# Allegro board Power_Source_Board_20180717.brd
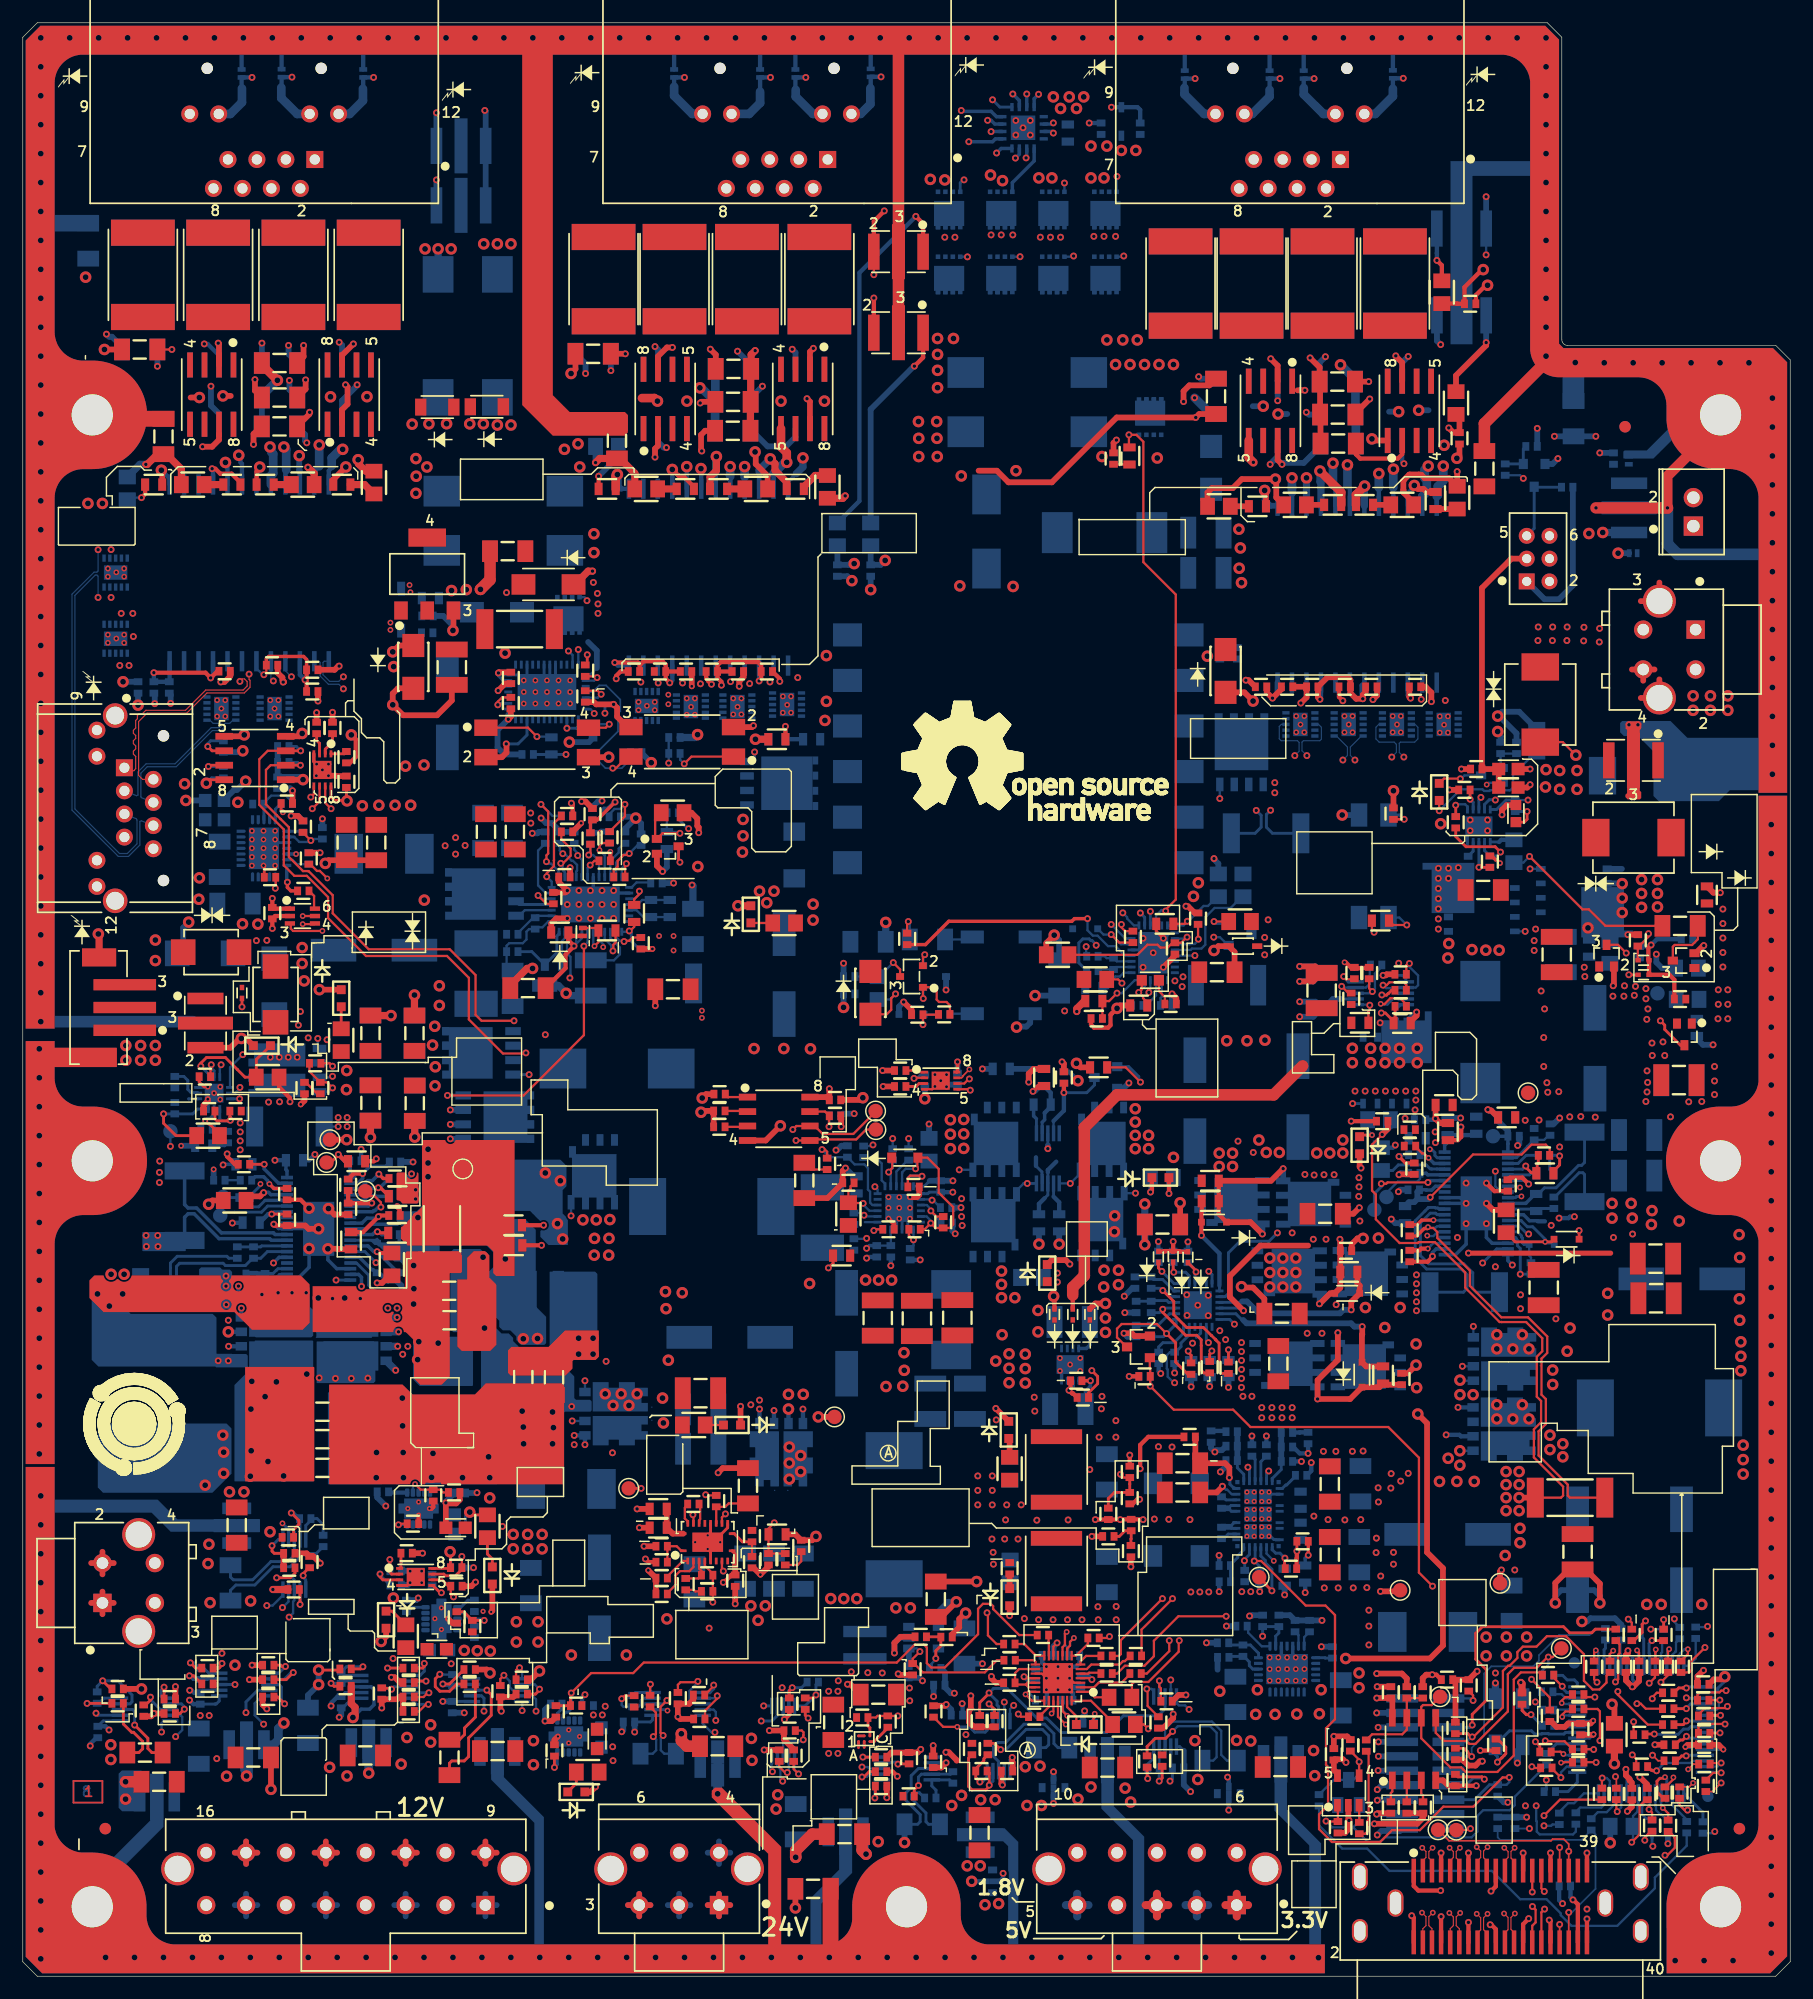
[diagram p0: board, top side]
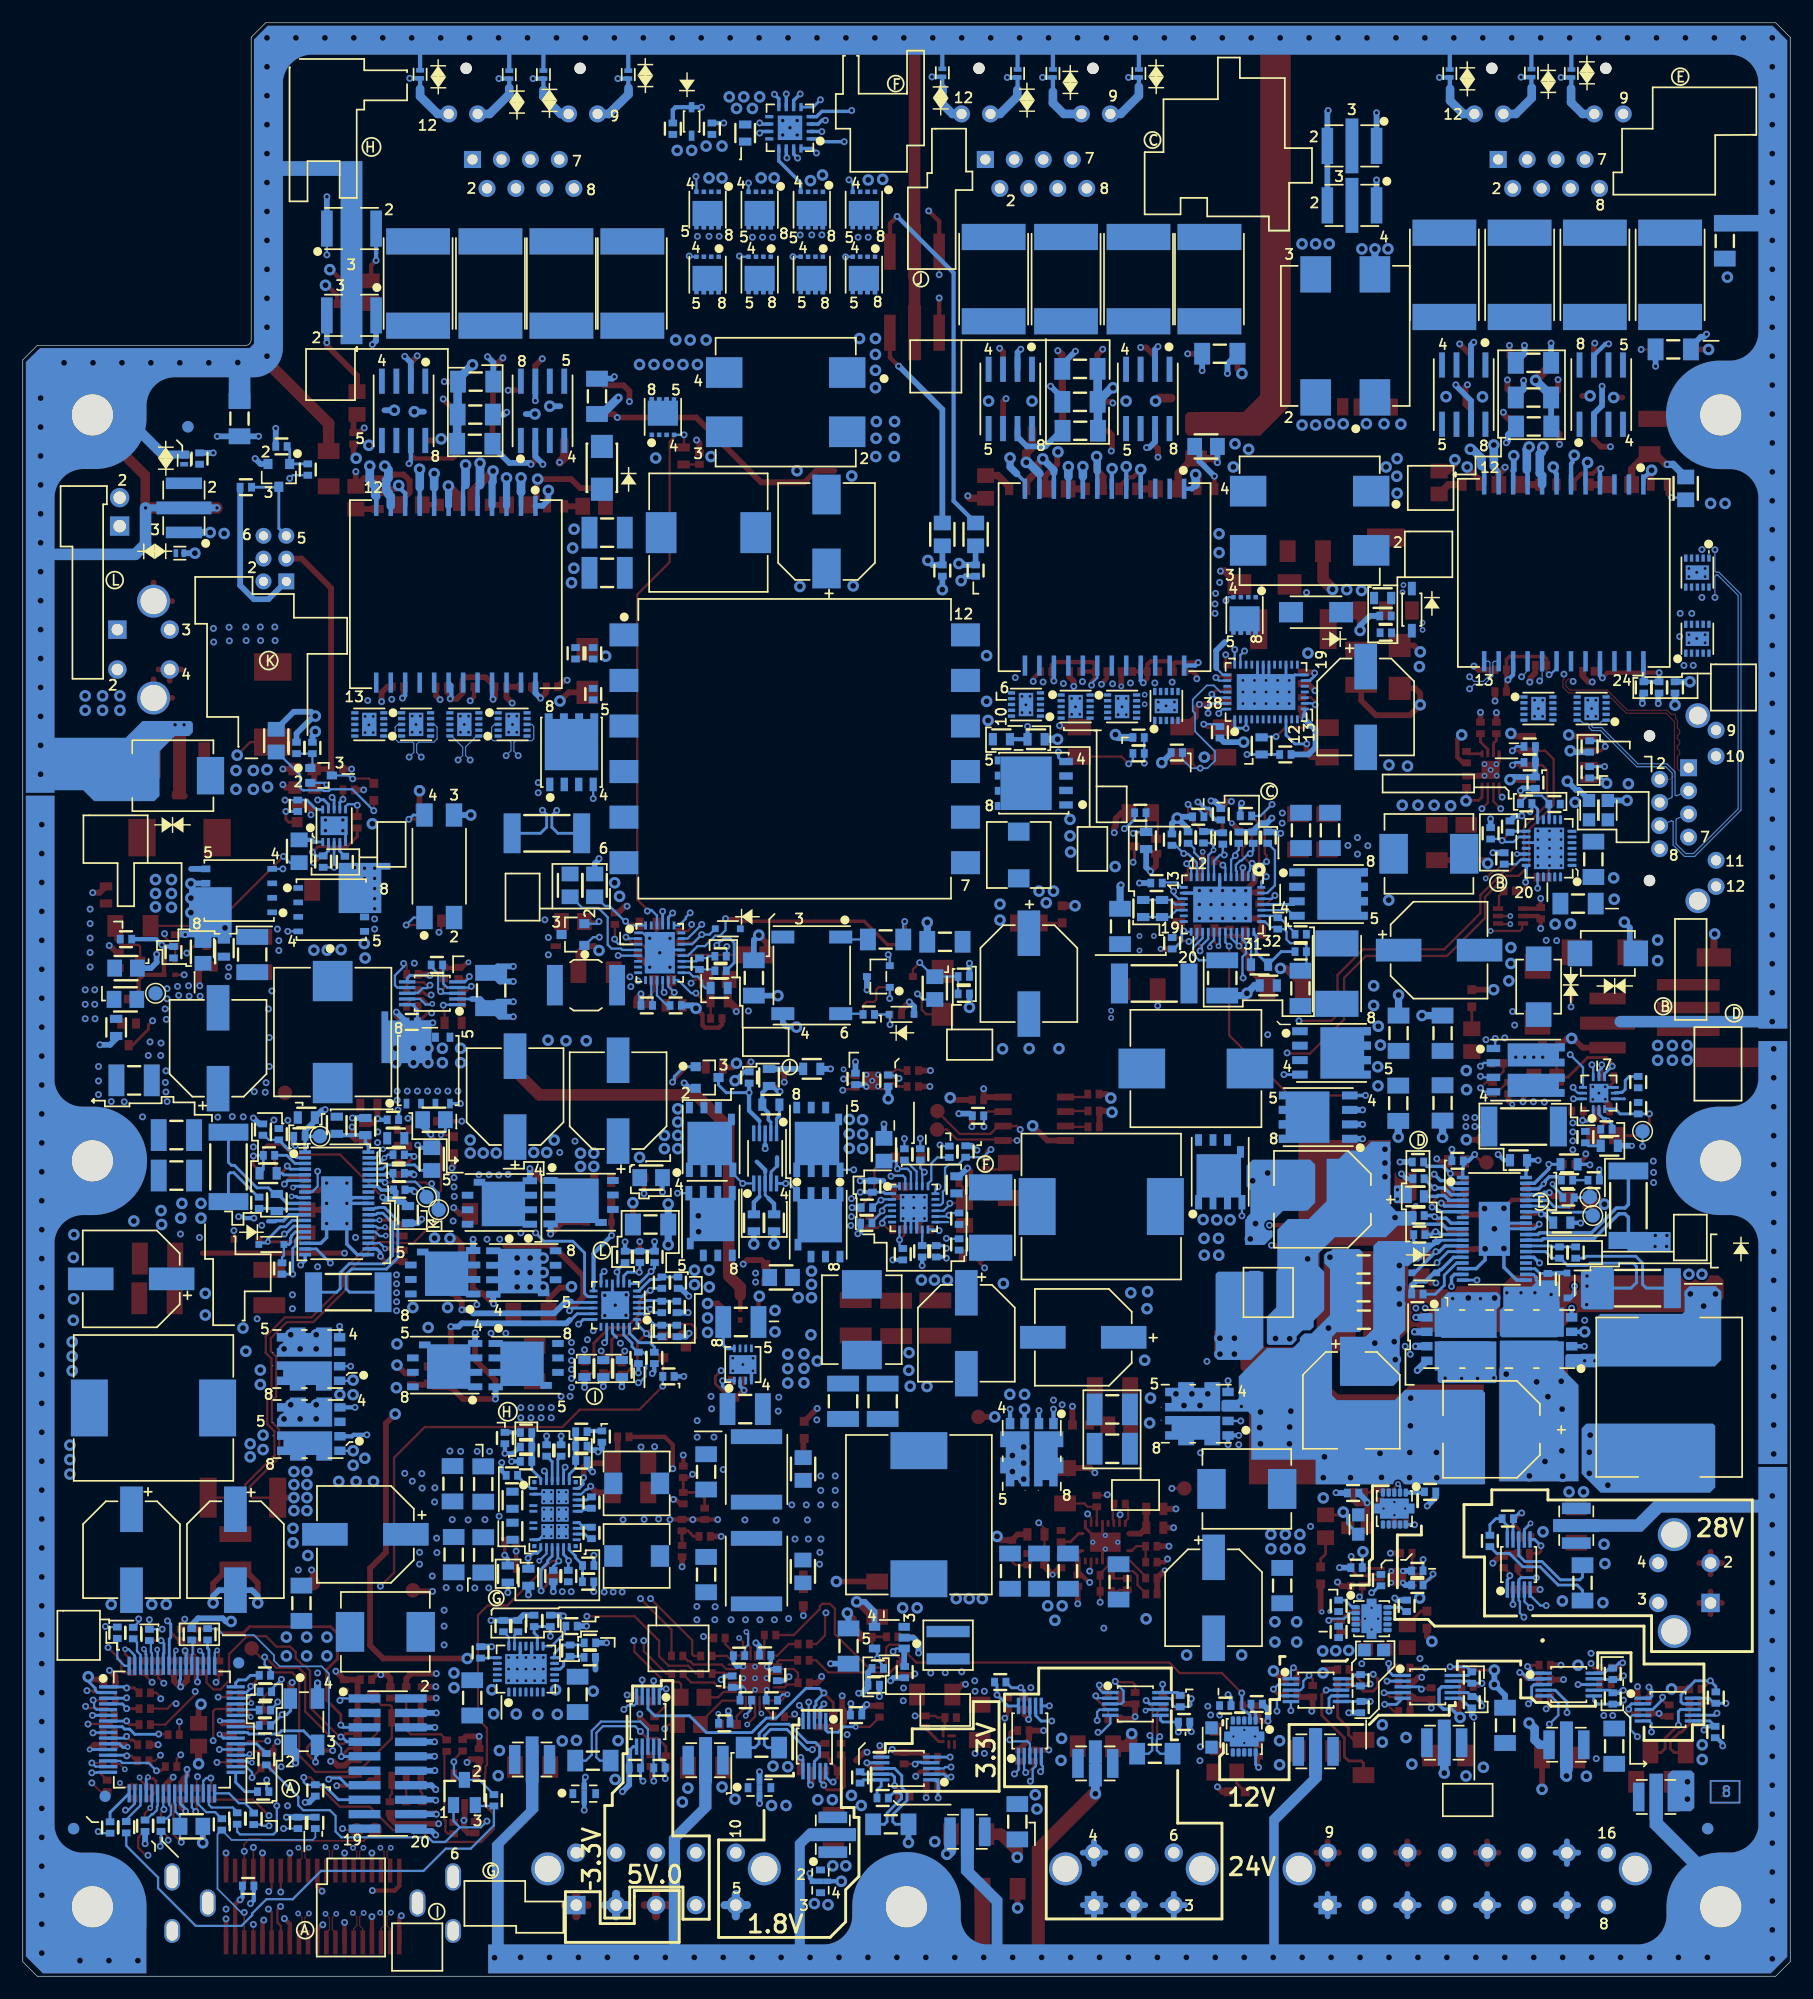
[diagram p1: board, bottom side, seen from below]

Outline 155.08 x 171.48 mm; copper layers: TOP, GND1, SIG1, GND2, PWR, SIG2, GND3, BOTTOM. Coordinates in mm from the lower left corner of the outline.
Outline path: 0,170.21 1.27,171.48 133.77,171.48 135.04,170.21 135.04,143.66 arc(135.19,143.31) 135.55,143.16 153.81,143.16 155.08,141.89 155.08,1.27 153.81,0 1.27,0 0,1.27 0,170.21

## Design rules (mm)
net group DIFFPAIR0: nets PC_ETH_D0N PC_ETH_D0P
net group DIFFPAIR9: nets PA_ETH_D2N PA_ETH_D2P
net group DIFFPAIR10: nets PA_ETH_D1N PA_ETH_D1P
net group DP1: nets CHASIS_GND N479533
net group N430544: nets N430544 N430548
net group N430972: nets N430972 N431358
net group PA_ETH_D3: nets PA_ETH_D3N PA_ETH_D3P
net group DIFFPAIR5: nets PB_ETH_D0N
net group N430248: nets N430628

## Placement (name value [footprint] x y rotation side)
C1  0.47UF  [EMIFIL_101X43W474MV4E]  76.83 151.38 180 top
C2  0.1uF  [CC0402]  127 146.81 0 top
C3  0.47UF  [EMIFIL_101X43W474MV4E]  76.83 144.27 180 top
C3L1  1uF  [CC1206]  18.77 39.6 90 top
C3L2  1uF  [CC1206]  60.97 20.19 0 top
C3L3  1uF  [CC1206]  41.66 19.76 0 top
C3L4  1uF  [CC1206]  30.06 19.38 0 top
C3L5  1uF  [CC1206]  20.23 19.2 0 top
C3L6  1uF  [CC1206]  110.35 18.36 0 top
C3L7  1uF  [CC1206]  95.17 18.31 0 top
C3L8  1uF  [CC1206]  11.96 17.07 180 top
C3L9  1uF  [CC1206]  83.95 12.6 90 top
C3L10  1uF  [CC1206]  72.09 12.47 0 top
C3M1  0.22uF  [CC0402]  51.49 99.97 90 top
C3M2  0.47uF  [CC0603]  51.26 91.8 0 top
C3M3  0.1uF  [CC0603]  47.12 91.62 180 top
C3M4  0.01uF  [CC0402]  51.49 99.97 90 bottom
C3M5  0.1uF  [CC0603]  56.77 93.73 90 bottom
C3M6  0.1uF  [CC0603]  45.8 86.97 0 bottom
C3M7  150uF  [CAPAE830X1050N]  26.21 48.01 270 bottom
C3M8  150uF  [CAPAE830X1050N]  136.42 37.44 180 bottom
C4  1000PF  [CC1206]  12.34 135.16 90 top
C5  0.1uF  [CC0402]  126.06 135 270 top
C6  1000PF  [CC1206]  52.13 134.78 90 top
C7  10nF  [CC0402]  95.71 133.22 90 top
C8  1000PF  [CC1206]  128.24 132.33 90 top
C9  0.01uF  [CC0805]  30.81 131.11 90 top
C10  0.01uF  [CC0805]  14.91 130.94 180 top
C11  0.01uF  [CC0805]  24.57 130.94 0 top
C12  0.01uF  [CC0805]  70.6 130.74 270 top
C13  0.01uF  [CC0805]  54.7 130.56 180 top
C14  0.01uF  [CC0805]  64.35 130.56 0 top
C15  0.01uF  [CC0805]  125.86 129.79 90 top
C16  0.01uF  [CC0805]  111.63 129.16 180 top
C17  0.01uF  [CC0805]  121.03 129.16 0 top
C18  0.01uF  [CC0805]  104.95 129.03 180 top
C19  0.22uF  [CC1206]  42.55 125.09 0 top
C20  10nF  [CC0402]  21.87 115.09 0 top
C21  1.0uF  [CC1210]  37.64 114.91 90 top
C22  1000PF  [CC0402]  25.4 114.68 0 top
C23  0.1uF  [CC0402]  17.71 114.55 0 top
C24  10nF  [CC0402]  53.63 114.53 180 top
C25  1000PF  [CC0402]  55.91 114.53 180 top
C26  0.1uF  [CC0402]  58.2 114.53 0 top
C27  1000PF  [CC0402]  60.46 114.53 180 top
C28  10nF  [CC0402]  62.74 114.53 0 top
C29  0.1uF  [CC0402]  65.28 114.53 0 top
C30  0.1uF  [CC0402]  42.82 113.97 270 top
C31  10nF  [CC0402]  108.65 113.19 180 top
C32  0.1uF  [CC0402]  110.93 113.19 0 top
C33  10nF  [CC0402]  113.14 113.19 180 top
C34  0.1uF  [CC0402]  115.99 113.19 180 top
C35  1000PF  [CC0402]  118.33 113.19 0 top
C36  1000PF  [CC0402]  122.16 113.19 0 top
C37  0.1uF  [CC0402]  25.4 112.78 0 top
C38  0.47UF  [EMIFIL_101X43W474MV4E]  141.33 106.73 180 top
C39  0.1uF  [CC0402]  127.53 105.97 180 top
C40  0.1uF  [CC0402]  28.4 104.85 90 top
C41  3.3nF  [CAPC1608X90N_B]  131.01 102.06 90 top
C42  10uF  [CC1206]  40.64 100.46 90 top
C43  10uF  [CC1206]  43.18 100.46 90 top
C44  10uF  [CC1206]  28.42 99.52 270 top
C45  10uF  [CC1206]  31.01 99.52 270 top
C46  0.1uF  [CC0402]  47.52 96.49 180 top
C47  0.022uF  [CC0402]  21.69 96.47 180 top
C48  0.47uF  [CC0603]  147.78 94.92 90 top
C49  0.1uF  [CC0402]  21.89 93.32 270 top
C50  0.33UF  [CC0603]  53.64 93.29 270 top
C51  0.047uF  [CC0603]  100.2 92.38 180 top
C52  100pF  [CC0402]  101.09 90.22 270 top
C53  4.7uF  [CC1210]  134.59 89.69 90 top
C54  10uF  [CC1206]  104.78 88.14 0 top
C55  15nF  [CC0402]  120.9 87.95 0 top
C56  3.3nF  [CAPC1608X90N_B]  98.93 87.43 0 top
C57  10uF  [CC1206]  44.32 86.74 180 top
C58  10uF  [CC1206]  57.05 86.64 180 top
C59  1.0uF  [CC1210]  113.97 86.53 270 top
C60  330pF  [CC0603]  97.92 85.22 0 top
C61  0.1uF  [CC0603]  121.03 83.67 180 top
C62  0.47UF  [EMIFIL_101X43W474MV4E]  16.03 83.67 270 top
C63  10uF  [CC1206]  30.51 82.78 90 top
C64  10uF  [CC1206]  34.37 82.78 90 top
C65  0.082uF  [CC0402]  15.98 78.97 180 top
C66  4.7uF  [CC1210]  145.31 78.66 0 top
C67  NM  [CC0402]  24.71 77.97 90 top
C68  0.1uF  [CC0402]  71.27 76.92 0 top
C69  10uF  [CC1206]  30.51 76.66 270 top
C70  10uF  [CC1206]  34.39 76.63 270 top
C71  1000PF  [CC0402]  121.72 72.87 180 top
C72  0.022uF  [CC0402]  122.1 70.89 270 top
C73  15nF  [CC1206]  68.57 69.86 90 top
C74  0.1uF  [CC0603]  104.19 69.82 0 top
C75  0.1uF  [CC0402]  130.3 69.42 270 top
C76  1000PF  [CC0402]  23.19 68.66 270 top
C77  0.1uF  [CC0402]  28.55 67.36 270 top
C78  1uF  [CC1206]  114.27 66.93 180 top
C79  0.033uF  [CC0402]  23.19 66.4 270 top
C80  4.7uF  [CC0805]  130.15 66.27 90 top
C81  NM  [CC1206]  100 65.99 180 top
C82  0.1uF  [CC0402]  75.95 65.57 180 top
C83  NM  [CC0402]  121.69 65.48 90 top
C84  0.47uF  [CC0603]  32.82 65.25 180 top
C85  0.082uF  [CC0402]  116.1 63.68 180 top
C86  0.1uF  [CC0402]  121.69 63.22 270 top
C87  4.7uF  [CC1210]  143.26 62.99 0 top
C88  4.7uF  [CC0805]  32.38 62.48 270 top
C89  4.7uF  [CC1210]  133.45 60.45 270 top
C90  10uF  [CC1206]  37.41 60.17 0 top
C91  4.7uF  [CC1210]  143.31 59.51 0 top
C92  0.82uF  [CC1206]  110.49 58.17 0 top
C93  4.7uF  [CC1210]  82 57.8 270 top
C94  4.7uF  [CC1210]  75.01 57.78 270 top
C95  4.7uF  [CC1210]  78.45 57.74 270 top
C96  10uF  [CC1206]  37.44 57.58 0 top
C97  0.82uF  [CC1206]  110.16 53.77 90 top
C98  0.1uF  [CC0402]  98.42 52.65 180 top
C99  10uF  [CC1206]  43.92 52.6 270 top
C100  10uF  [CC1206]  46.61 52.58 270 top
C101  0.082uF  [CC0402]  120.98 52.43 270 top
C102  4.7uF  [CC1210]  59.46 51.18 0 top
C103  10uF  [CC1206]  26.29 49.56 0 top
C104  10uF  [CC1206]  26.29 47.14 0 top
C105  1uF  [CC1206]  101.75 45.03 180 top
C106  10uF  [CC1206]  26.29 44.63 0 top
C107  47uF  [CAPC5750X250N_A]  90.7 44.49 90 top
C108  4.7pF  [CC0402]  97.13 44.27 270 top
C109  10uF  [CC1206]  114.68 43.21 90 top
C110  1uF  [CC1206]  63.63 43.05 90 top
C111  1uF  [CC1206]  101.75 42.47 180 top
C112  0.1uF  [CC0402]  58.84 41.45 180 top
C113  0.1uF  [CC0603]  55.75 41.02 180 top
C114  4.7pF  [CC0402]  97.23 37.31 90 top
C115  4.7uF  [CC1210]  136.42 37.26 270 top
C116  0.1uF  [CC0402]  23.38 37.12 180 top
C117  10uF  [CC1206]  114.68 37.01 270 top
C118  10nF  [CC0402]  66.9 36.6 90 top
C119  15pF  [CC0402]  63.98 36.35 270 top
C120  47uF  [CAPC5750X250N_A]  90.7 35.56 270 top
C121  1.2PF  [CC0402]  60.05 35.2 0 top
C122  10nF  [CC0402]  58.17 34.42 270 top
C123  .047uF  [CC0402]  56.06 33.55 180 top
C124  10uF  [CC1206]  80.11 33.1 90 top
C125  15pF  [CC0402]  81.05 29.77 180 top
C126  0.1uF  [CC0402]  140.67 27.17 270 top
C127  0.1uF  [CC0402]  141.81 27.17 270 top
C128  0.1uF  [CC0402]  124.97 26.04 180 top
C129  0.1uF  [CC0402]  147.45 25.63 180 top
C130  0.1uF  [CC0402]  120.04 24.92 90 top
C131  10uF  [CC1206]  75.07 24.72 0 top
C132  12pF  [CC0402]  131.55 24.37 90 top
C133  10uF  [CC1206]  71.12 22.29 90 top
C134  0.1uF  [CC0402]  136.68 21.69 270 top
C135  4.7uF  [CC0805]  139.65 21.2 270 top
C136  12pF  [CC0402]  129.27 20.31 270 top
C137  0.1uF  [CC0402]  147.53 20.31 0 top
C138  0.1uF  [CC0402]  115.04 19.48 90 top
C139  0.1uF  [CC0402]  79.88 18.82 90 top
C140  0.1uF  [CC0402]  84.12 18.01 0 top
C141  0.1uF  [CC0402]  86.36 18.01 0 top
C142  0.1uF  [CC0402]  141.18 15.99 90 top
C143  0.1uF  [CC0402]  142.55 15.99 90 top
C144  1000PF  [CC1206]  69.34 7.67 180 top
C145  0.047uF  [CC0603]  91.69 161.8 90 bottom
C146  0.47UF  [EMIFIL_101X43W474MV4E]  38.46 160.67 0 bottom
C147  0.47UF  [EMIFIL_101X43W474MV4E]  38.46 155.45 0 bottom
C148  0.47UF  [EMIFIL_101X43W474MV4E]  126.24 153.42 180 bottom
C149  1000PF  [CC1206]  5.74 152.32 270 bottom
C150  0.47UF  [EMIFIL_101X43W474MV4E]  126.24 145.8 0 bottom
C151  1000PF  [CC1206]  136.07 136.73 270 bottom
C152  0.01uF  [CC0805]  51.26 134.29 180 bottom
C153  0.01uF  [CC0805]  9.17 130.61 90 bottom
C154  0.47UF  [EMIFIL_101X43W474MV4E]  140.94 128.89 90 bottom
C155  22uF  [CAPAE830X1080N]  84.56 126.82 90 bottom
C156  2.2uF  [CC1210]  103.81 126.72 0 bottom
C157  0.1uF  [CC0402]  74.4 123.39 270 bottom
C158  0.1uF  [CC0402]  71.48 123.39 270 bottom
C159  2.2uF  [CC1210]  103.81 123.19 0 bottom
C160  0.1uF  [CC0402]  35.51 119.41 0 bottom
C161  1000PF  [CC0402]  12.85 113.13 270 bottom
C162  10nF  [CC0402]  11.5 113.13 270 bottom
C163  0.1uF  [CC0402]  10.11 113.13 270 bottom
C164  220pF  [CC0402]  105.03 112.55 90 bottom
C165  10uF  [CAPAE830X1050N]  37.25 111.42 180 bottom
C166  330pF  [CC0603]  69.22 108.58 0 bottom
C167  0.1uF  [CC0402]  22.35 104.78 270 bottom
C168  10uF  [CC1206]  42.93 100.58 90 bottom
C169  10uF  [CC1206]  40.39 100.58 90 bottom
C170  100pF  [CC0402]  49.78 99.87 90 bottom
C171  0.47uF  [CC0603]  56.52 99.69 270 bottom
C172  0.22uF  [CC0402]  126.82 97.82 90 bottom
C173  1000PF  [CC0402]  44.96 92.42 270 bottom
C174  10uF  [CC1206]  58.8 92.15 90 bottom
C175  1uF  [CC1206]  79.38 91.01 0 bottom
C176  10uF  [CC1206]  74.17 90.81 0 bottom
C177  1000PF  [CC0402]  54.23 90.68 90 bottom
C178  0.47uF  [CC0603]  137.44 90.25 90 bottom
C179  150uF  [CAPAE830X1050N]  30.81 90.07 90 bottom
C180  4.7uF  [CC1210]  134.95 89.69 90 bottom
C181  NM  [CC0402]  95.71 88.87 270 bottom
C182  0.33UF  [CC0603]  46.56 88.8 180 bottom
C183  150uF  [CAPAE830X1050N]  66.8 88.01 180 bottom
C184  0.1uF  [CC0402]  72.52 87.76 180 bottom
C185  1000PF  [CC1206]  90.93 87.63 270 bottom
C186  2.2uF  [CC1210]  49.83 87.63 270 bottom
C187  1uF  [CC1206]  42.98 86.72 270 bottom
C188  1.0uF  [CC1210]  113.99 86.53 270 bottom
C189  0.1uF  [CC0402]  97.79 85.22 180 bottom
C190  2.2nF  [CC0402]  80.85 84.43 180 bottom
C191  1800pF  [CC0402]  120.95 83.77 180 bottom
C192  0.47uF  [CC0603]  146.89 83.29 270 bottom
C193  10uF  [CC1206]  34.37 82.78 90 bottom
C194  10uF  [CC1206]  30.51 82.78 90 bottom
C195  150uF  [CAPAE830X1050N]  137.95 81.46 0 bottom
C196  0.1uF  [CC0603]  85.85 79.65 180 bottom
C197  0.1uF  [CC0402]  82.02 78.77 270 bottom
C198  4.7uF  [CC1210]  145.31 78.64 0 bottom
C199  150uF  [CAPAE830X1050N]  111.89 77.22 0 bottom
C200  150uF  [CAPAE830X1050N]  102.84 76.86 0 bottom
C201  10uF  [CC1206]  30.51 76.66 270 bottom
C202  10uF  [CC1206]  34.39 76.63 270 bottom
C203  0.1uF  [CC0402]  132.61 73.91 90 bottom
C204  4.7uF  [CC1210]  141.6 73.84 0 bottom
C205  0.1uF  [CC0603]  15.88 72.9 180 bottom
C206  4.7uF  [CC0805]  79.52 72.55 90 bottom
C207  100pF  [CC0402]  72.36 72.4 90 bottom
C208  0.1uF  [CC0402]  76.33 72.14 270 bottom
C209  0.1uF  [CC0402]  32.66 71.48 0 bottom
C210  4.7uF  [CC1210]  141.6 70.28 0 bottom
C211  0.022uF  [CC0402]  17.25 69.88 180 bottom
C212  NM  [CC0603]  73.15 69.47 90 bottom
C213  0.1uF  [CC0402]  80.53 69.33 90 bottom
C214  0.033uF  [CC0402]  122.05 69.04 180 bottom
C215  150uF  [CAPAE830X1050N]  41.05 68.2 270 bottom
C216  0.47uF  [CC0603]  132.79 67.92 270 bottom
C217  1000PF  [CC0402]  72.92 66.5 90 bottom
C218  0.1uF  [CC0603]  90.94 66.14 270 bottom
C219  0.1uF  [CC0603]  89.16 66.14 270 bottom
C220  NM  [CC1206]  100 65.99 180 bottom
C221  NM  [CC0402]  20.24 63.53 90 bottom
C222  10uF  [CC1206]  37.44 62.48 0 bottom
C223  0.1uF  [CC0402]  132.33 62.13 270 bottom
C224  150uF  [CAPAE830X1050N]  145.57 61.21 270 bottom
C225  0.1uF  [CC0402]  21.26 61.19 270 bottom
C226  10uF  [CC1206]  37.44 60.05 0 bottom
C227  0.1uF  [CC0402]  32.72 59.87 180 bottom
C228  10uF  [CC1206]  37.41 57.63 0 bottom
C229  1.0uF  [CC1210]  92.08 57.43 0 bottom
C230  0.1uF  [CC0603]  102.51 53.34 90 bottom
C231  0.1uF  [CC0603]  105.79 53.34 270 bottom
C232  0.1uF  [CC0603]  104.14 53.34 270 bottom
C233  150uF  [CAPAE830X1050N]  38.51 50.55 180 bottom
C234  4.7uF  [CC1210]  83.11 50.47 270 bottom
C235  4.7uF  [CC1210]  79.63 50.47 270 bottom
C236  1.0uF  [CC1210]  91.69 49.78 0 bottom
C237  4.7uF  [CC1210]  59.49 49.76 0 bottom
C238  220pF  [CC0402]  104.27 47.37 90 bottom
C239  220pF  [CC0402]  112.78 47.24 90 bottom
C240  NM  [CC0402]  106.07 46.53 0 bottom
C241  NM  [CC0402]  110.92 46.46 180 bottom
C242  4.7uF  [CC1210]  59.49 46.3 0 bottom
C243  10nF  [CC0402]  109.12 46.15 90 bottom
C244  10nF  [CC0402]  107.85 46.15 90 bottom
C245  4.7uF  [CC0805]  86.61 44.53 90 bottom
C246  47uF  [CAPC5750X250N_A]  90.7 44.49 90 bottom
C247  1uF  [CC1206]  95.12 44.27 90 bottom
C248  10uF  [CC1206]  117.37 43.23 90 bottom
C249  10uF  [CC1206]  114.68 43.21 90 bottom
C250  1000PF  [CC0402]  31.6 42.52 180 bottom
C251  0.1uF  [CC0402]  38.35 42.42 0 bottom
C252  0.1uF  [CC0603]  112.12 41.78 270 bottom
C253  0.1uF  [CC0402]  105.18 41.58 270 bottom
C254  0.1uF  [CC0402]  24.78 40.17 180 bottom
C255  0.33UF  [CAP_101X41W334MV4E]  18.77 39.55 270 bottom
C256  0.1uF  [CC0603]  112.12 39.07 90 bottom
C257  0.1uF  [CC0402]  105.18 38.91 90 bottom
C258  150uF  [CAPAE830X1050N]  125.02 38.79 270 bottom
C259  150uF  [CAPAE830X1050N]  145.54 37.44 180 bottom
C260  10uF  [CC1206]  117.27 37.01 270 bottom
C261  10uF  [CC1206]  114.68 36.98 270 bottom
C262  0.1uF  [CC0402]  38.05 35.86 0 bottom
C263  47uF  [CAPC5750X250N_A]  90.7 35.56 270 bottom
C264  10uF  [CC1206]  68.45 35.56 270 bottom
C265  10uF  [CC1206]  65.91 35.56 270 bottom
C266  10uF  [CC1206]  63.37 35.56 270 bottom
C267  4.7uF  [CC0805]  86.63 35.53 270 bottom
C268  1uF  [CC1206]  95.12 35.26 270 bottom
C269  10uF  [CC1206]  58.93 34.62 270 bottom
C270  10uF  [CC1206]  44.58 34.29 270 bottom
C271  150uF  [CAPAE830X1050N]  50.6 33.22 180 bottom
C272  10uF  [CC1206]  130.63 32.74 90 bottom
C273  1000PF  [CC0402]  39.62 32.51 270 bottom
C274  0.1uF  [CC0402]  39.62 30.23 90 bottom
C275  10uF  [CC1206]  82.63 28.98 270 bottom
C276  0.022uF  [CC0402]  114.92 28.43 90 bottom
C277  0.1uF  [CC0402]  89.94 28.17 180 bottom
C278  0.1uF  [CC0402]  15.57 26.54 270 bottom
C279  0.1uF  [CC0402]  88.87 26.44 90 bottom
C280  0.1uF  [CC0402]  27.94 26.21 270 bottom
C281  0.1uF  [CC0402]  37.71 25.98 270 bottom
C282  0.1uF  [CC0402]  92.84 25.86 270 bottom
C283  0.1uF  [CC0402]  69.31 25.82 180 bottom
C284  0.1uF  [CC0402]  80.42 25.55 180 bottom
C285  0.1uF  [CC0402]  6.53 24.46 90 bottom
C286  0.1uF  [CC0402]  15.57 24.38 270 bottom
C287  0.1uF  [CC0402]  53.51 24.16 270 bottom
C288  0.1uF  [CC0402]  27.94 24.05 270 bottom
C289  1000PF  [CC0402]  46.81 23.89 180 bottom
C290  0.1uF  [CC0402]  49.57 23.76 180 bottom
C291  0.1uF  [CC0402]  37.68 23.62 90 bottom
C292  0.1uF  [CC0402]  81.96 22.92 180 bottom
C293  0.1uF  [CC0402]  53.19 22.32 0 bottom
C294  0.1uF  [CC0402]  6.58 21.44 90 bottom
C295  0.33UF  [CAP_101X41W334MV4E]  30.35 20.5 180 bottom
C296  0.33UF  [CAP_101X41W334MV4E]  19.63 20.32 180 bottom
C297  0.33UF  [CAP_101X41W334MV4E]  41.64 19.74 180 bottom
C298  0.33UF  [CAP_101X41W334MV4E]  110.39 19.02 180 bottom
C299  0.33UF  [CAP_101X41W334MV4E]  95.17 18.97 180 bottom
C300  0.33UF  [CAP_101X41W334MV4E]  60.97 18.68 180 bottom
C301  0.1uF  [CC0402]  101.37 18.29 0 bottom
C302  0.1uF  [CC0402]  99.21 18.29 0 bottom
C303  0.1uF  [CC0402]  81.61 17.45 90 bottom
C304  YFF21PC  [FIL_YFF21PC0J226MT000N]  90.44 16.55 180 bottom
C305  1000PF  [CC0402]  129.41 16.31 270 bottom
C306  YFF21PC  [FIL_YFF21PC0J226MT000N]  105.82 16.03 180 bottom
C307  0.33UF  [CAP_101X41W334MV4E]  11.77 15.73 0 bottom
C308  4.7uF  [CC0805]  140.28 13.16 180 bottom
C309  0.33UF  [CAP_101X41W334MV4E]  72.2 12.68 180 bottom
C310  0.33UF  [CAP_101X41W334MV4E]  84.01 12.42 270 bottom
C311  YFF21PC  [FIL_YFF21PC0J226MT000N]  85.09 8.33 270 bottom
C312  0.1uF  [CC0402]  135.31 7.92 0 bottom
CIN1  10uF  [CC1206]  17.27 98.04 90 bottom
CIN2  10uF  [CC1206]  18.62 94.16 0 bottom
CIN3  150uF  [CAPAE830X1050N]  72.29 56.44 180 bottom
CIN4  10uF  [CC1206]  106.4 24.74 270 bottom
CIN5  10uF  [CC1206]  115.65 24.43 270 bottom
COUT1  150uF  [CAPAE830X1050N]  62.03 56.08 270 bottom
D1  SBR2U60S1F-7  [SODFL3518X115N]  40.72 137.77 180 top
D2  SBR2U60S1F-7  [SODFL3518X115N]  36.37 137.74 180 top
D3  S1B  [DIOM5127X229N]  46.13 122.17 0 top
D4  SMAJ58A  [DIO_DO214AC_SMA]  34.26 114.94 270 top
D5  NM  [DIO_DO214AC_SMA]  105.54 114.58 270 top
D6  5.0SMDJ24CA  [DIOM7959X262N_LF_BI]  133.15 111.63 90 top
D7  5.0SMDJ24CA  [DIOM7959X262N_LF_BI]  141.33 99.95 180 top
D8  LED  [LED_LTST-C190]  63.88 93.22 90 top
D9  BAV19WS  [SOD2513X110N_A]  107.06 90.42 180 top
D10  SMBJ10CA  [DIOM5436X261N_LF_BI]  16.52 89.9 0 top
D11  BAS40SL  [SODFL1006X43N_FC_AEE]  142.21 89.18 0 top
D12  BAS40SL  [SODFL1006X43N_FC_AEE]  142.21 87.91 0 top
D13  NM  [DIO_DO214AC_SMA]  74.37 86.32 90 top
D14  BAS40SL  [SODFL1006X43N_FC_AEE]  19.23 86.31 90 top
D15  SMBJ10CA  [DIOM5436X261N_LF_BI]  22.17 86.18 270 top
D16  LED  [LED_LTST-C190]  27.94 85.85 90 top
D17  BAS170W  [SOD2513X115N]  77.39 71.86 0 top
D18  LED  [LED_LTST-C190]  99.82 70.1 0 top
D19  BAT46WJ,115  [SODFL2513X80N]  104.52 66.19 180 top
D20  BAT46WJ,115  [SODFL2513X80N]  135.46 64.69 180 top
D21  BAS40SL  [SODFL1006X43N_FC_AEE]  100.94 63.17 270 top
D22  BAS40SL  [SODFL1006X43N_FC_AEE]  99.64 63.14 270 top
D23  BAS40SL  [SODFL1006X43N_FC_AEE]  102.23 63.12 270 top
D24  BAT46WJ,115  [SODFL2513X80N]  116.2 59.94 0 top
D25  BAS40SL  [SODFL1006X43N_FC_AEE]  90.53 58.09 270 top
D26  BAS40SL  [SODFL1006X43N_FC_AEE]  92.13 58.09 270 top
D27  BAS40SL  [SODFL1006X43N_FC_AEE]  93.62 58.09 270 top
D28  BAT46WJ,115  [SODFL2513X80N]  117.5 52.81 90 top
D29  LED  [LED_LTST-C190]  62.23 48.39 0 top
D30  LED  [LED_LTST-C190]  86.51 47.96 90 top
D31  LED  [LED_LTST-C190]  86.59 33.27 270 top
D32  LED  [LED_LTST-C190]  31.88 31.29 270 top
D33  LED  [LED_LTST-C190]  93.19 22.1 180 top
D34  LED  [LED_LTST-C190]  48.56 16.18 0 top
D35  PESD3V3X1BL,315  [DFN98X58X50-2N_NXP]  74.4 167.08 90 bottom
D36  PESD3V3X1BL,315  [DFN98X58X50-2N_NXP]  22.71 167.06 90 bottom
D37  PESD3V3X1BL,315  [DFN98X58X50-2N_NXP]  67.79 167.03 90 bottom
D38  PESD3V3X1BL,315  [DFN98X58X50-2N_NXP]  64.69 167.03 90 bottom
D39  PESD3V3X1BL,315  [DFN98X58X50-2N_NXP]  57.15 167.03 90 bottom
D40  PESD3V3X1BL,315  [DFN98X58X50-2N_NXP]  29.87 167.03 90 bottom
D41  PESD3V3X1BL,315  [DFN98X58X50-2N_NXP]  19.2 167.03 90 bottom
D42  PESD3V3X1BL,315  [DFN98X58X50-2N_NXP]  120.22 166.95 90 bottom
D43  PESD3V3X1BL,315  [DFN98X58X50-2N_NXP]  112.39 166.93 90 bottom
D44  PESD3V3X1BL,315  [DFN98X58X50-2N_NXP]  109.4 166.93 90 bottom
D45  PESD3V3X1BL,315  [DFN98X58X50-2N_NXP]  101.96 166.93 90 bottom
D46  MMSZ5252BS-7-F  [SOD2513X120N_A]  96.39 162.81 90 bottom
D47  PESD3V3X1BL,315  [DFN98X58X50-2N_NXP]  140.92 133.07 90 bottom
D48  NM  [DIO_DO214AC_SMA]  104.27 132.41 270 bottom
D49  PESD3V3X1BL,315  [DFN98X58X50-2N_NXP]  141.3 124.92 0 bottom
D50  MMSZ5230B-7-F  [SOD3715X145N_DI]  33.2 119.96 90 bottom
D51  S1B  [DIOM5127X229N]  41.61 119.74 0 bottom
D52  LED  [LED_LTST-C190]  124.28 103.96 90 top
D53  5.0SMDJ24CA  [DIOM7959X262N_LF_BI]  141.91 105.38 0 bottom
D54  PMEG1020EA  [SOD2512X110N_NXP]  93.22 91.95 180 bottom
D55  SMBJ10CA  [DIOM5436X261N_LF_BI]  16 89.79 180 bottom
D56  SMBJ10CA  [DIOM5436X261N_LF_BI]  22.07 86.87 270 bottom
D57  BAT46WJ,115  [SODFL2513X80N]  77.98 84.43 180 bottom
D58  LED  [LED_LTST-C190]  20.98 81.69 180 top
D59  LED  [LED_LTST-C190]  117.3 72.95 270 top
D60  BAT46WJ,115  [SODFL2513X80N]  133.27 64.24 0 bottom
D61  BAT46WJ,115  [SODFL2513X80N]  32.11 61.75 0 bottom
D62  LED  [LED_LTST-C190]  89.89 61.72 90 top
D63  BAT46WJ,115  [SODFL2513X80N]  19.58 60.63 270 bottom
D64  LED  [LED_LTST-C190]  41.2 35.18 270 top
DB1  1N4448HLP  [DFN101X61X53-2N_1K]  49.15 91.67 270 top
F1  0ZCF0100AF2A  [FUSER_0ZCF0100AF2A]  10.54 149.35 270 top
F2  0ZCF0100AF2A  [FUSER_0ZCF0100AF2A]  17.14 149.35 270 top
F3  0ZCF0100AF2A  [FUSER_0ZCF0100AF2A]  23.74 149.35 270 top
F4  0ZCF0100AF2A  [FUSER_0ZCF0100AF2A]  30.35 149.35 270 top
F5  0ZCF0100AF2A  [FUSER_0ZCF0100AF2A]  50.96 148.97 270 top
F6  0ZCF0100AF2A  [FUSER_0ZCF0100AF2A]  57.19 148.97 270 top
F7  0ZCF0100AF2A  [FUSER_0ZCF0100AF2A]  63.54 148.97 270 top
F8  0ZCF0100AF2A  [FUSER_0ZCF0100AF2A]  69.89 148.97 270 top
F9  0ZCF0100AF2A  [FUSER_0ZCF0100AF2A]  101.59 148.59 90 top
F10  0ZCF0100AF2A  [FUSER_0ZCF0100AF2A]  107.81 148.59 90 top
F11  0ZCF0100AF2A  [FUSER_0ZCF0100AF2A]  114.04 148.59 90 top
F12  0ZCF0100AF2A  [FUSER_0ZCF0100AF2A]  120.4 148.59 90 top
F13  0ZCF0100AF2A  [FUSER_0ZCF0100AF2A]  30.35 149.35 270 bottom
F14  0ZCF0100AF2A  [FUSER_0ZCF0100AF2A]  23.74 149.35 270 bottom
F15  0ZCF0100AF2A  [FUSER_0ZCF0100AF2A]  17.14 149.35 270 bottom
F16  0ZCF0100AF2A  [FUSER_0ZCF0100AF2A]  10.54 149.35 270 bottom
F17  0ZCF0100AF2A  [FUSER_0ZCF0100AF2A]  69.89 148.97 270 bottom
F18  0ZCF0100AF2A  [FUSER_0ZCF0100AF2A]  63.54 148.97 270 bottom
F19  0ZCF0100AF2A  [FUSER_0ZCF0100AF2A]  57.19 148.97 270 bottom
F20  0ZCF0100AF2A  [FUSER_0ZCF0100AF2A]  50.96 148.97 270 bottom
F21  0ZCF0100AF2A  [FUSER_0ZCF0100AF2A]  120.4 148.59 270 bottom
F22  0ZCF0100AF2A  [FUSER_0ZCF0100AF2A]  114.05 148.59 90 bottom
F23  0ZCF0100AF2A  [FUSER_0ZCF0100AF2A]  107.82 148.59 270 bottom
F24  0ZCF0100AF2A  [FUSER_0ZCF0100AF2A]  101.6 148.59 270 bottom
FB1  NM  [INDC1608X95M]  130.35 105.97 180 top
FB2  NM  [INDC1608X95M]  130.35 104.34 180 top
FB3  NM  [INDC1608X95M]  37.97 39.37 180 top
FB4  NM  [INDC1608X95M]  36.32 28.7 0 top
FB5  NM  [INDC1608X95M]  50.39 20.83 90 top
FB6  NM  [INDC1608X95M]  17.65 102.36 270 bottom
FB7  FB  [INDC1608X95M]  16 102.36 270 bottom
FB8  NM  [INDC1608X95M]  37.9 39.65 90 bottom
FB9  NM  [INDC1608X95M]  36.53 28.63 0 bottom
FB10  NM  [INDC1608X95M]  50.77 20.95 90 bottom
ISO1  TPC817S1B RAG  [SOP259P1005X388-4N]  57.86 108.36 180 top
ISO2  TPC817S1B RAG  [SOP259P1005X388-4N]  45.14 108.31 0 top
ISO3  TPC817S1B RAG  [SOP259P1005X388-4N]  118.54 97.43 90 bottom
J1  RJ45_CONN  [AMPHENOL_MRJ-5384-M1]  25.62 159.48 180 top
J2  RJ45_CONN  [AMPHENOL_MRJ-5384-M1]  70.62 159.48 180 top
J3  RJ45_CONN  [AMPHENOL_MRJ-5384-M1]  115.62 159.48 180 top
J4  SWITCH HEADER  [HIROSE_DF1BZ-2P-2P5DSA]  146.58 127.29 270 top
J5  5 pin Conn_0  [HIROSE_DF11-6DP-2DSA]  131.96 122.44 270 top
J6  CONN  [MOLEX_1722992204]  146.74 118.21 270 top
J7  RJ45_CONN_VERT  [AMPHENOL_RJHSE3381A1]  8.92 106.08 90 top
J8  CONN  [MOLEX_1722992204]  7.03 32.77 90 top
J9  1722992110  [MOLEX_172299-2110]  106.52 6.24 180 top
J10  1722992106  [MOLEX_172299-2106]  61.09 6.24 180 top
J11  1722992116  [MOLEX_1722992116]  40.59 6.24 180 top
J12  CONN40  [HIROSE_FX18-40P-0P8SH_REL]  122.05 9.27 0 top
J13  FTSH-110-01-L-DV-K  [SAMTEC_FTSH-110-01-L-DV-K]  125.09 24.38 270 bottom
JTB1  B3B-PH-SM4-TB(LF)(SN)  [JST_B3B-PH-SM4-TB]  8.95 83.03 90 top
L1  ACM1211-102-2PL-TL01  [FIL_ACM1211-102-2PL]  39.04 143.99 90 bottom
L2  ACM1211-102-2PL-TL01  [FIL_ACM1211-102-2PL]  88.14 138.18 0 bottom
L3  ACM1211-102-2PL-TL01  [FIL_ACM1211-102-2PL]  42.16 127.76 0 bottom
L4  4.7uH  [IND_B82464G4472M000]  94.92 126.72 0 bottom
L5  1.5UH  [IND_SRP7030-1R5M]  31.7 98.53 0 bottom
L6  1uH  [WURTH_744316100]  67.69 98.42 270 bottom
L7  100uH  [IND_DO1608C-104MLB]  105.66 87 0 bottom
L8  1.5UH  [IND_PA4342P152ANLT]  127.89 82.88 270 bottom
L9  47uH  [INDM115103X400N]  52.15 79.68 0 bottom
L10  8.2uH  [INDM135126X650N]  60.45 67.56 180 bottom
L11  3.3uH  [IND_SRP4030FA-3R3M]  45.8 60.02 90 bottom
L12  1.5UH  [IND_SRP7030-1R5M]  81.46 57.63 270 bottom
L13  4.7uH  [IND_PA4343P472ANLT]  10.62 50.83 90 bottom
L14  4.7uH  [IND_PA4343P472ANLT]  143.61 49.89 180 bottom
L15  1uH  [WURTH_744316100]  101.22 43.26 0 bottom
L16  1.5UH  [IND_SRP7030-1R5M]  47.68 42.77 0 bottom
L17  8.2uH  [INDM135126X650N]  76.45 40.51 270 bottom
L18  1uH  [WURTH_744316100]  101.22 36.89 0 bottom
L19  1.5UH  [IND_SRP7030-1R5M]  123.27 30.23 180 bottom
L20  3.3uH  [IND_SRP4030FA-3R3M]  73.89 29.06 0 bottom
M1  BSC035N10NS5ATMA1  [TDSON127P590X515X110-8N_VST]  137.15 95.3 0 bottom
M2  CSD18540Q5BT  [SON127P600X500X105-8N_TI_REL]  40.51 95 180 bottom
M3  BSC035N10NS5ATMA1  [TDSON127P590X515X110-8N_VST]  126.97 93.62 180 bottom
M4  CSD18540Q5BT  [SON127P600X500X105-8N_TI_REL]  40.25 81.05 180 bottom
M5  BSC035N10NS5ATMA1  [TDSON127P590X515X110-8N_VST]  119.51 80.55 90 bottom
M6  CSD18540Q5BT  [SON127P600X500X105-8N_TI_REL]  41.41 75.41 0 bottom
M7  NVMFD5C650  [DFN127P490X590X110-8N]  29.08 55.93 270 bottom
M8  NVMFD5C650  [DFN127P490X590X110-8N]  21.97 55.93 90 bottom
M9  NVMFD5C650  [DFN127P490X590X110-8N]  130.07 54.18 90 bottom
M10  NVMFD5C650  [DFN127P490X590X110-8N]  52.12 49.38 90 bottom
M11  NVMFD5C650  [DFN127P490X590X110-8N]  130.05 48.03 90 bottom
M12  NVMFD5C650  [DFN127P490X590X110-8N]  66.55 45.72 0 bottom
MT1  ?  [MTG360_750]  148.97 137.06 0 top
MT2  ?  [MTG360_750]  6.1 137.06 0 top
MT3  ?  [MTG360_750]  6.1 6.1 0 top
MT4  ?  [MTG360_750]  77.55 6.1 0 top
MT5  ?  [MTG360_750]  148.97 6.1 0 top
MT6  ?  [MTG360_750]  148.97 71.58 0 top
MT7  ?  [MTG360_750]  6.1 71.58 0 top
NOREF  -  []  1.27 0 90 top
NOREF#2  -  []  0 1.27 0 top
NOREF#3  -  [unnamed#2]  7.24 12.95 0 top
NOREF#4  -  [unnamed#2]  150.62 12.95 0 top
NOREF#5  -  [unnamed#2]  140.59 136.02 0 top
NOREF#6  -  [unnamed#2]  7.24 12.95 180 bottom
NOREF#7  -  [unnamed#2]  150.62 12.95 180 bottom
NOREF#8  -  [unnamed#2]  140.59 136.02 180 bottom
Q1  FZT796ATA  [SOT230P700X180-4N_B]  35.48 123.09 0 top
Q2  DMG1012UW-7  [SOT65P210X110-3N_DI]  56.59 99.19 270 top
Q3  DMG1012UW-7  [SOT65P210X110-3N_DI]  138.96 89.58 0 top
Q4  DMG1012UW-7  [SOT65P210X110-3N_DI]  145.73 89.15 90 top
Q5  PBSS4140T  [SOT95P230X110-3N]  77.98 87.76 90 top
Q6  DMG1012UW-7  [SOT65P210X110-3N_DI]  145.8 82.68 180 top
Q7  2N7002L  [SOT92P240X120-3N]  97.89 55.24 90 top
Q8  TPN3300ANH,LQ  [MOSFET_TPN3300ANH]  95 155.07 270 bottom
Q9  TPN3300ANH,LQ  [MOSFET_TPN3300ANH]  90.42 155.07 270 bottom
Q10  TPN3300ANH,LQ  [MOSFET_TPN3300ANH]  85.85 155.07 270 bottom
Q11  TPN3300ANH,LQ  [MOSFET_TPN3300ANH]  81.28 155.07 270 bottom
Q12  TPN3300ANH,LQ  [MOSFET_TPN3300ANH]  95 149.37 270 bottom
Q13  TPN3300ANH,LQ  [MOSFET_TPN3300ANH]  90.42 149.37 270 bottom
Q14  TPN3300ANH,LQ  [MOSFET_TPN3300ANH]  85.85 149.37 270 bottom
Q15  TPN3300ANH,LQ  [MOSFET_TPN3300ANH]  81.28 149.37 270 bottom
Q16  TPN3300ANH,LQ  [MOSFET_TPN3300ANH]  98.92 136.88 90 bottom
Q17  2N7002L  [SOT92P240X120-3N]  132.61 131.75 0 bottom
Q18  TPN3300ANH,LQ  [MOSFET_TPN3300ANH]  47.88 119.48 270 bottom
Q19  BSC190N15NS3  [SON127P590X515X110-9N]  106.93 107.44 90 bottom
Q20  DMG1012UW-7  [SOT65P210X110-3N_DI]  128.91 105.41 270 bottom
Q21  BSC320N20NS3  [SON127P590X515X110-9N]  66.37 104.72 0 bottom
Q22  FMMT723  [SOT92P240X110-3N]  106.81 91.44 90 bottom
Q23  PBSS5140T  [SOT95P230X110-3N]  80.01 87.76 90 bottom
Q24  IPG20N10S4L35ATMA1  [SON127P615X515X100-8N]  23.22 79.54 180 bottom
Q25  2N7002L  [SOT92P240X120-3N]  95.03 78.89 270 bottom
Q26  SQJ409EP-T1_GE3  [SON127P589X490X112-8N_REL]  94.68 73.46 90 bottom
Q27  SQJ409EP-T1_GE3  [SON127P589X490X112-8N_REL]  85.27 73.46 90 bottom
Q28  SQJ409EP-T1_GE3  [SON127P589X490X112-8N_REL]  50.01 70.61 90 bottom
Q29  SQJ409EP-T1_GE3  [SON127P589X490X112-8N_REL]  106.1 67.94 180 bottom
Q30  SQJ409EP-T1_GE3  [SON127P589X490X112-8N_REL]  113.26 67.92 0 bottom
Q31  SQJ409EP-T1_GE3  [SON127P589X490X112-8N_REL]  94.73 66.07 270 bottom
Q32  SQJ409EP-T1_GE3  [SON127P589X490X112-8N_REL]  85.28 65.97 270 bottom
Q33  SQJ409EP-T1_GE3  [SON127P589X490X112-8N_REL]  118.24 61.8 0 bottom
Q34  SQJ409EP-T1_GE3  [SON127P589X490X112-8N_REL]  111.12 61.77 180 bottom
Q35  SQJ409EP-T1_GE3  [SON127P589X490X112-8N_REL]  118.06 53.64 0 bottom
Q36  SQJ409EP-T1_GE3  [SON127P589X490X112-8N_REL]  110.92 53.64 180 bottom
Q37  NM  [SOT23_132]  116.33 16.13 180 bottom
R1  120  [RC0805]  124.51 147.83 270 top
R2  1M  [RC1206]  10.26 142.8 180 top
R3  1M  [RC1206]  50.04 142.42 180 top
R4  1M  [RC1206]  22.52 141.61 180 top
R5  1M  [RC1206]  62.36 141.1 0 top
R6  1M  [RC1206]  115.34 139.98 180 top
R7  1M  [RC1206]  104.7 138.69 270 top
R8  1M  [RC1206]  22.53 138.58 180 top
R9  1M  [RC1206]  62.32 138.2 0 top
R10  120  [RC0805]  125.76 138.1 270 top
R11  1M  [RC1206]  115.38 137.09 180 top
R12  1M  [RC1206]  22.52 136.05 180 top
R13  1M  [RC1206]  62.29 135.66 180 top
R14  1M  [RC1206]  115.42 134.54 180 top
R15  3.3K  [RC0603]  97.1 133.45 270 top
R16  75E  [RC0603]  11.48 130.94 180 top
R17  75E  [RC0603]  18.34 130.94 180 top
R18  75E  [RC0603]  21.26 130.94 0 top
R19  75E  [RC0603]  27.99 130.94 0 top
R20  75E  [RC0603]  51.27 130.56 180 top
R21  75E  [RC0603]  58.13 130.56 180 top
R22  75E  [RC0603]  61.05 130.56 0 top
R23  75E  [RC0603]  67.78 130.56 0 top
R24  75E  [RC0603]  123.95 129.54 270 top
R25  75E  [RC0603]  114.94 129.16 180 top
R26  75E  [RC0603]  117.73 129.16 0 top
R27  75E  [RC0603]  108.33 129.03 180 top
R28  0.25E  [RC2512]  43.59 118.25 0 top
R29  0  [RC0402]  49.35 114.6 270 top
R30  10K  [RC0402]  49.35 112.34 270 top
R31  10K  [RC0402]  42.82 111.76 90 top
R32  10K  [RC0402]  25.78 109.58 90 top
R33  10K  [RC0402]  27.18 109.58 90 top
R34  36  [RC0603]  66.17 108.58 0 top
R35  10K  [RC0402]  28.4 107.01 90 top
R36  10K  [RC0402]  126.49 104.14 180 top
R37  30.1K  [RC0402]  23.16 102.95 0 top
R38  4.7M  [RC0805]  57.02 102.13 0 top
R39  10K  [RC0402]  120.27 102.06 90 top
R40  75K  [RC0402]  49.99 102.01 90 top
R41  0  [RC0402]  47.75 101.85 180 top
R42  909K  [RC0402]  125.73 101.3 270 top
R43  10K  [RC0402]  24.59 100.91 90 top
R44  0  [RC0402]  47.75 100.46 0 top
R45  10K  [RC0402]  49.81 99.87 270 top
R46  7.15K  [RC0402]  25.1 98.12 90 top
R47  10K  [RC0402]  51.05 97.92 0 top
R48  57.6K  [RC0402]  128.73 97.84 270 top
R49  4mOhm  [RC1206]  128.14 95.35 0 top
R50  0  [RC0402]  24.61 95.28 180 top
R51  0  [RC0402]  46.56 94.64 90 top
R52  118  [RC0402]  103.12 92.84 270 top
R53  4.7K  [RC0603]  119.13 92.66 0 top
R54  20  [RC0805]  106.81 92.58 180 top
R55  2.2K  [RC0805]  66.8 92.46 180 top
R56  470K  [RC1206]  145.41 92.2 180 top
R57  0  [RC0402]  97.41 91.24 270 top
R58  100  [RC0402]  77.6 91.06 270 top
R59  10K  [RC0402]  141.71 90.93 270 top
R60  10K  [RC0402]  54.23 90.68 90 top
R61  52.3K  [RC0805]  90.81 89.66 0 top
R62  100K  [RC0402]  116.84 88.06 90 top
R63  7.15K  [RC0402]  118.14 88.06 90 top
R64  5.23K  [RC0805]  94.11 87.5 180 top
R65  100K  [RC0402]  120.9 86.55 180 top
R66  100K  [RC0402]  116.56 85.8 90 top
R67  2.2K  [RC0402]  145.41 85.78 0 top
R68  3.65K  [RC0603]  93.98 85.6 180 top
R69  51K  [RC0402]  100.71 85.34 180 top
R70  0  [RC0402]  120.9 85.14 180 top
R71  15  [RC0402]  80.85 84.43 0 top
R72  10K  [RC0402]  78.49 84.4 0 top
R73  2.00K  [RC0402]  94.23 84.07 0 top
R74  3.3K  [RC0603]  117.32 83.69 0 top
R75  1K  [RC0805]  27.94 82.17 90 top
R76  10E  [RC0402]  25.65 80.14 0 top
R77  402K  [RC0603]  94.4 79.78 0 top
R78  10K  [RC0402]  76.99 79.5 180 top
R79  620E  [RC0805]  21.49 78.92 180 top
R80  10K  [RC0402]  91.35 78.89 270 top
R81  27.4K  [RC0603]  89.61 78.89 270 top
R82  10K  [RC0402]  76.99 78.11 180 top
R83  NM  [RC0402]  26.11 77.97 270 top
R84  10K  [RC0402]  61.14 77.43 180 top
R85  412K  [RC0603]  124.71 76.48 180 top
R86  10K  [RC0402]  61.12 75.96 0 top
R87  3.74M  [RC0402]  16.36 75.95 180 top
R88  100K  [RC0402]  18.67 75.95 0 top
R89  NM  [RC0402]  71.27 75.53 0 top
R90  NM  [RC0603]  130.2 75.39 0 top
R91  0  [RC0402]  119.28 75.06 0 top
R92  10K  [RC0402]  61.12 74.56 0 top
R93  8.06K  [RC0402]  121.69 74.32 180 top
R94  NM  [RC0603]  125.04 74.14 90 top
R95  5.23K  [RC0805]  16.26 73.79 180 top
R96  0  [RC0402]  133.48 72.06 180 top
R97  NM  [RC0603]  29.29 71.54 180 top
R98  15K  [RC0402]  70.58 71.31 90 top
R99  3.83K  [RC0402]  19.41 71.27 180 top
R100  200K  [RC0603]  133.55 70.48 0 top
R101  0  [RC0402]  32.64 70.03 180 top
R102  24.9K  [RC0402]  72.44 69.65 180 top
R103  100K  [RC0402]  28.55 69.47 270 top
R104  0  [RC0402]  78.16 69.29 0 top
R105  200K  [RC0603]  32.87 68.48 0 top
R106  52.3K  [RC0805]  18.59 68.1 180 top
R107  4.7K  [RC0603]  104.19 68.05 0 top
R108  475K  [CC0805]  72.44 66.9 90 top
R109  6.65K  [RC0402]  32.61 66.78 0 top
R110  NM  [RC0402]  80.76 66.18 270 top
R111  NM  [RC0603]  43.05 65.93 180 top
R112  0.01E  [RC2512]  36.78 65.61 270 top
R113  NM  [RC0402]  78.25 65.57 180 top
R114  NM  [RC0603]  28.8 64.57 90 top
R115  453K  [RC0603]  43.08 64.16 180 top
R116  NM  [RC0603]  71.85 63.25 180 top
R117  4.7K  [RC0603]  116.35 61.82 180 top
R118  3.74M  [RC0402]  104.14 53.47 270 top
R119  3.74M  [RC0402]  105.79 53.42 270 top
R120  3.74M  [RC0402]  102.51 53.34 270 top
R121  4.7K  [RC0603]  119.35 52.78 270 top
R122  17.4K  [RC0402]  92.43 52.27 180 top
R123  10K  [RC0402]  93.01 50.8 0 top
R124  2.2K  [RC0805]  58.88 48.39 0 top
R125  0  [RC0402]  102.39 47.35 180 top
R126  120  [RC0805]  86.59 44.55 90 top
R127  NM  [RC0402]  37.85 42.47 180 top
R128  150K  [RC0402]  36.02 42.21 270 top
R129  0.01E  [RC2512]  135.76 42.01 180 top
R130  1M  [RC0402]  97.13 41.97 270 top
R131  20K  [RC0402]  60.85 41.71 90 top
R132  309K  [RC0402]  95.25 40.59 90 top
R133  57.6K  [RC0402]  34.23 39.73 0 top
R134  191K  [RC0402]  97.25 39.6 270 top
R135  620E  [RC0805]  40.77 39.5 270 top
R136  2.1E  [RC0603]  55.75 39.37 0 top
R137  18K  [RC0603]  66.18 38.79 180 top
R138  294E  [RC0402]  63.98 38.63 90 top
R139  1M  [RC0402]  95.25 38.61 180 top
R140  10E  [RC0402]  23.26 38.52 180 top
R141  NM  [RC0402]  112.29 38.18 180 top
R142  2.67K  [RC0402]  68.3 37.77 270 top
R143  6.65K  [RC0402]  56.06 37.74 180 top
R144  10K  [RC0402]  33.68 37.13 0 top
R145  1.27K  [RC0402]  65.43 36.6 270 top
R146  10K  [RC0402]  25.16 36.36 90 top
R147  100K  [RC0402]  56.06 36.35 0 top
R148  10K  [RC0402]  38.02 35.86 0 top
R149  10K  [RC0402]  23.38 35.85 0 top
R150  294E  [RC0402]  86.59 35.81 270 top
R151  909K  [RC0402]  111.27 35.78 0 top
R152  28.7K  [RC0402]  56.06 34.95 180 top
R153  20K  [RC0402]  62.51 34.72 90 top
R154  2.2K  [RC0402]  38.05 34.24 180 top
R155  10K  [RC0402]  23.77 33.95 180 top
R156  10K  [RC0402]  60.05 33.78 0 top
R157  150K  [RC0402]  38.07 31.5 270 top
R158  NM  [RC0402]  39.45 30.73 90 top
R159  0  [RC0402]  139.78 29.96 90 top
R160  0  [RC0402]  141.18 29.96 270 top
R161  0  [RC0402]  143.97 29.96 270 top
R162  0  [RC0402]  89.51 29.95 180 top
R163  620E  [RC0805]  33.6 29.84 90 top
R164  10K  [RC0402]  78.79 29.79 0 top
R165  0  [RC0402]  93.95 29.69 0 top
R166  0  [RC0402]  86.56 29.16 180 top
R167  0  [RC0402]  95.1 28.12 0 top
R168  0  [RC0402]  97.66 28.12 0 top
R169  0  [RC0402]  86.59 27.74 180 top
R170  10K  [RC0402]  21.54 27.3 180 top
R171  0  [RC0402]  137.88 27.17 270 top
R172  0  [RC0402]  139.27 27.17 270 top
R173  0  [RC0402]  143.21 27.17 270 top
R174  0  [RC0402]  144.35 27.17 90 top
R175  0  [RC0402]  145.5 27.17 90 top
R176  10E  [RC0402]  16.21 27.05 0 top
R177  10K  [RC0402]  33.86 27.05 0 top
R178  10E  [RC0402]  28.32 26.97 180 top
R179  10K  [RC0402]  78.08 26.95 90 top
R180  10E  [RC0402]  39.21 26.92 0 top
R181  0  [RC0402]  95.1 26.57 0 top
R182  0  [RC0402]  97.64 26.57 0 top
R183  0  [RC0402]  133.83 26.44 180 top
R184  10K  [RC0402]  21.54 26.04 180 top
R185  10K  [RC0402]  43.78 26.03 0 top
R186  10K  [RC0402]  33.86 25.78 180 top
R187  10K  [RC0402]  86.56 25.76 180 top
R188  10E  [RC0402]  16.21 25.65 0 top
R189  10E  [RC0402]  39.21 25.65 0 top
R190  100  [RC0402]  126.87 25.53 270 top
R191  10E  [RC0402]  28.32 25.45 0 top
R192  10E  [RC0402]  8.32 25.22 0 top
R193  10K  [RC0402]  41.9 25.02 90 top
R194  NM  [RC0402]  121.44 24.92 90 top
R195  10K  [RC0402]  122.83 24.92 90 top
R196  0  [RC0402]  144.38 24.88 0 top
R197  10K  [RC0402]  31.5 24.82 90 top
R198  10K  [RC0402]  43.78 24.76 0 top
R199  0  [RC0402]  136.48 24.73 180 top
R200  10K  [RC0402]  59.33 24.69 0 top
R201  10K  [RC0402]  21.54 24.51 0 top
R202  2.2K  [RC0402]  33.86 24.51 0 top
R203  120  [RC0805]  96.32 24.49 0 top
R204  10K  [RC0402]  57.48 24.41 90 top
R205  10K  [RC0402]  12.89 24.33 0 top
R206  0  [RC0402]  147.45 24.23 0 top
R207  10E  [RC0402]  55.04 24.16 270 top
R208  10E  [RC0402]  53.64 24.13 270 top
R209  10K  [RC0402]  100.36 24.13 180 top
R210  10E  [RC0402]  8.32 23.95 0 top
R211  10E  [RC0402]  67.26 23.93 270 top
R212  10E  [RC0402]  68.66 23.93 270 top
R213  NM  [RC0402]  48.55 23.76 180 top
R214  0  [RC0402]  144.38 23.49 0 top
R215  0  [RC0402]  136.48 23.46 180 top
R216  10K  [RC0402]  10.61 23.31 90 top
R217  NM  [RC0402]  46.78 23.25 270 top
R218  2.2K  [RC0402]  33.86 23.24 0 top
R219  10K  [RC0402]  79.91 23.24 90 top
R220  10K  [RC0402]  12.89 23.06 0 top
R221  10K  [RC0402]  133.99 22.86 90 top
R222  0  [RC0402]  147.53 22.85 180 top
R223  0  [RC0402]  88.75 22.78 180 top
R224  NM  [RC0402]  73.66 22.71 0 top
R225  10K  [RC0402]  59.36 22.58 0 top
R226  10K  [RC0402]  83.96 22.39 90 top
R227  10K  [RC0402]  85.26 22.39 270 top
R228  10K  [RC0402]  75.9 22.35 270 top
R229  10K  [RC0402]  99.64 22.28 270 top
R230  120  [RC0805]  96.62 22.1 0 top
R231  0  [RC0402]  144.38 22.09 180 top
R232  10K  [RC0402]  125.7 21.79 270 top
R233  10K  [RC0402]  67.28 21.56 0 top
R234  0  [RC0402]  147.53 21.33 180 top
R235  0  [RC0402]  141.84 21.2 0 top
R236  10K  [RC0402]  144.5 20.32 180 top
R237  10K  [RC0402]  116.48 20.27 90 top
R238  0  [RC0402]  117.88 20.24 270 top
R239  10E  [RC0402]  83.28 19.94 90 top
R240  10E  [RC0402]  84.68 19.94 90 top
R241  0  [RC0402]  136.48 19.93 180 top
R242  57.6K  [RC0402]  46.65 19.82 90 top
R243  0  [RC0402]  133.6 19.68 180 top
R244  0.002  [RC1206]  10.72 19.63 0 top
R245  10K  [RC0402]  125.7 19.51 90 top
R246  10K  [RC0402]  66.37 19.36 90 top
R247  10K  [RC0402]  67.64 19.36 270 top
R248  2.2K  [RC0402]  75.31 19.23 180 top
R249  0.002  [RC1206]  37.44 19.2 270 top
R250  2.2K  [RC0402]  77.76 19.14 270 top
R251  10E  [RC0402]  99.97 18.92 90 top
R252  0  [RC0402]  144.51 18.91 180 top
R253  10E  [RC0402]  98.65 18.85 90 top
R254  0  [RC0402]  136.48 18.79 0 top
R255  0  [RC0402]  147.55 18.62 180 top
R256  0  [RC0402]  142.07 18.41 180 top
R257  0  [RC0402]  133.68 18.29 180 top
R258  10K  [RC0402]  75.31 17.96 0 top
R259  620E  [RC0805]  49.57 17.92 180 top
R260  10K  [RC0402]  125.7 17.22 270 top
R261  0  [RC0402]  147.68 16.71 270 top
R262  10K  [RC0402]  75.31 16.69 180 top
R263  0  [RC0402]  144.1 16.12 90 top
R264  0  [RC0402]  145.37 16.12 90 top
R265  0  [RC0402]  138.56 16 90 top
R266  0  [RC0402]  139.83 16 270 top
R267  10E  [RC0402]  77.72 15.8 180 top
R268  10K  [RC0402]  120.04 14.81 270 top
R269  10K  [RC0402]  121.44 14.81 90 top
R270  10K  [RC0402]  122.86 14.81 90 top
R271  0  [RC0402]  142.96 13.22 270 top
R272  0  [RC0402]  144.37 13.21 270 top
R273  100K  [RC0402]  115.39 13.08 270 top
R274  0  [RC0402]  117.27 13 90 top
R275  NM  [RC0402]  98.04 162.18 90 bottom
R276  0  [RC0402]  94.61 162.18 270 bottom
R277  1M  [RC1206]  10.26 142.81 0 bottom
R278  1M  [RC1206]  50.05 142.43 0 bottom
R279  1M  [RC1206]  22.53 141.63 180 bottom
R280  1M  [RC1206]  62.32 141.1 180 bottom
R281  1M  [RC1206]  115.34 139.98 180 bottom
R282  1M  [RC1206]  104.7 138.69 90 bottom
R283  1M  [RC1206]  22.53 138.58 180 bottom
R284  1M  [RC1206]  62.32 138.2 180 bottom
R285  1M  [RC1206]  115.38 137.09 180 bottom
R286  1M  [RC1206]  22.51 136.04 180 bottom
R287  1M  [RC1206]  62.29 135.66 180 bottom
R288  1M  [RC1206]  115.42 134.52 180 bottom
R289  100K  [RC0402]  132.38 134.29 180 bottom
R290  845K  [RC0402]  139.57 133.22 270 bottom
R291  10K  [RC0402]  130.07 132.26 90 bottom
R292  10K  [RC0402]  135.51 130.71 180 bottom
R293  120  [RC0805]  74.4 126.57 90 bottom
R294  120  [RC0805]  71.48 126.57 90 bottom
R295  10E  [RC0603]  35.76 120.98 180 bottom
R296  100K  [RC0402]  35.48 117.93 180 bottom
R297  51  [RC0402]  106.58 116.13 90 bottom
R298  51  [RC0402]  105.03 116.13 90 bottom
R299  10K  [RC0402]  50.04 109.19 90 bottom
R300  10K  [RC0402]  57.18 108.74 180 bottom
R301  36  [RC0603]  66.17 108.58 0 bottom
R302  120  [RC0805]  132.84 108.46 270 bottom
R303  4.7K  [RC0603]  46.38 108 90 bottom
R304  2.2K  [RC0402]  22.86 107.95 0 bottom
R305  2.2K  [RC0402]  17.6 107.95 90 bottom
R306  100K  [RC0402]  131.06 107.82 270 bottom
R307  100K  [RC0402]  129.67 107.82 90 bottom
R308  10K  [RC0402]  53.82 107.42 180 bottom
R309  0  [RC0402]  57.18 107.34 180 bottom
R310  2.2K  [RC0402]  44.3 107.25 0 bottom
R311  2.2K  [RC0402]  22.86 106.55 0 bottom
R312  2.2K  [RC0402]  17.6 105.69 90 bottom
R313  9.09K  [RC0402]  23.16 102.95 180 bottom
R314  619K  [RC0402]  20.68 102.9 0 bottom
R315  22K  [RC0402]  130.95 102.75 270 bottom
R316  2.2K  [RC0402]  57.02 102.13 180 bottom
R317  845K  [RC0402]  49.96 102.01 270 bottom
R318  0  [RC0402]  47.75 101.85 180 bottom
R319  200E  [RC0402]  51.94 101.78 0 bottom
R320  0  [RC0402]  24.59 100.91 270 bottom
R321  0.015  [RC2512]  109.09 100.33 180 bottom
R322  NM  [RC0402]  26.29 100.33 270 bottom
R323  95.3k  [RC0402]  52.83 99.95 90 bottom
R324  2.2K  [RC0402]  48.39 99.95 270 bottom
R325  2.2K  [RC0402]  47.12 99.95 270 bottom
R326  0  [RC0402]  45.85 99.95 90 bottom
R327  NM  [RC0402]  54.25 99.77 90 bottom
R328  4.7M  [RC0805]  130.84 98.76 90 bottom
R329  17.4K  [RC0402]  25.1 98.12 90 bottom
R330  243K  [RC0402]  128.73 97.84 90 bottom
R331  0  [RC0402]  55.6 95.96 180 bottom
R332  52.3  [RC0805]  107.06 95.76 270 bottom
R333  8.2  [RC0805]  104.9 95.76 270 bottom
R334  301k  [RC0603]  55.12 93.73 90 bottom
R335  0  [RC0402]  42.95 91.47 0 bottom
R336  2.2K  [RC0402]  146.02 91.03 0 bottom
R337  0  [RC0402]  42.95 89.94 180 bottom
R338  4.7M  [RC0805]  139.27 89.92 90 bottom
R339  2.2K  [RC0402]  141.86 89.89 270 bottom
R340  0  [RC0402]  93.85 89.53 180 bottom
R341  499  [RC0402]  118.75 88.77 0 bottom
R342  4.7M  [RC0805]  146.02 88.49 180 bottom
R343  0  [RC0402]  93.85 88.27 180 bottom
R344  0.008  [RESC6432X47N]  39.78 88.01 270 bottom
R345  0.03  [RC2512]  55.8 87.15 180 bottom
R346  36K  [RC0603]  93.98 86.74 0 bottom
R347  NM  [RC0805]  75.06 86.74 270 bottom
R348  0  [RC0402]  72.52 86.23 180 bottom
R349  4.7M  [RC0805]  146.08 85.75 180 bottom
R350  107K  [RC0402]  100.33 85.22 180 bottom
R351  402K  [RC0603]  89.6 78.9 270 bottom
R352  100K  [RC0402]  91.35 78.89 270 bottom
R353  10K  [RC0402]  79.15 78.61 90 bottom
R354  49.9K  [RC0402]  13.34 78.49 270 bottom
R355  249K  [RC0603]  89.45 76.51 180 bottom
R356  26.1K  [RC0402]  13.34 76.2 270 bottom
R357  10K  [RC0402]  71.27 75.53 0 bottom
R358  NM  [RC0603]  130.2 75.37 180 bottom
R359  56.2K  [RC0402]  122.61 75.18 180 bottom
R360  2.2K  [RC0805]  119 75.18 180 bottom
R361  453K  [RC0603]  127.53 74.7 90 bottom
R362  27.4K  [RC0603]  125.02 74.59 90 bottom
R363  0.01E  [RC2512]  23.39 74.59 0 bottom
R364  910K  [RC0402]  16.12 74.35 0 bottom
R365  100K  [RC0402]  134.01 74.32 90 bottom
R366  0  [RC0402]  130.81 73.74 180 bottom
R367  10E  [RC0402]  17.97 73.66 90 bottom
R368  73.2K  [RC0603]  122.35 73.56 180 bottom
R369  0  [RC0402]  73.78 72.37 270 bottom
R370  0  [RC0402]  77.72 72.14 270 bottom
R371  10K  [RC0402]  122.1 72.11 180 bottom
R372  0  [RC0402]  133.48 72.06 180 bottom
R373  52.3K  [RC0805]  119.2 71.73 90 bottom
R374  27.4K  [RC0603]  23.84 71.63 0 bottom
R375  0  [RC0402]  29.18 71.58 180 bottom
R376  86.6K  [RC0603]  19.41 71.27 180 bottom
R377  0.01E  [RC2512]  137.03 71.04 270 bottom
R378  200K  [RC0603]  133.55 70.48 0 bottom
R379  0  [RC0402]  122.1 70.48 0 bottom
R380  2.2K  [RC0805]  99.95 70.1 180 bottom
R381  0  [RC0402]  32.61 70 180 bottom
R382  3.83K  [RC0402]  19.58 69.88 180 bottom
R383  200K  [RC0603]  32.89 68.45 0 bottom
R384  0  [RC0402]  19.46 68.35 180 bottom
R385  51  [RC0402]  134.34 67.89 270 bottom
R386  0.0025  [RC2512]  14.2 67.64 90 bottom
R387  10K  [RC0402]  81.02 67.47 0 bottom
R388  200K  [RC0603]  121.28 66.85 270 bottom
R389  NM  [RC0402]  32.61 66.78 180 bottom
R390  200K  [RC0603]  20.04 66.15 180 bottom
R391  NM  [RC0402]  81.07 66.12 0 bottom
R392  51  [RC0402]  32.54 65.1 180 bottom
R393  NM  [RC0402]  72.92 64.24 90 bottom
R394  10K  [RC0402]  76.17 63.64 90 bottom
R395  10K  [RC0402]  74.93 63.64 270 bottom
R396  0  [RC0402]  18.82 63.53 270 bottom
R397  64.9k  [RC0402]  77.87 63.38 90 bottom
R398  100K  [RC0402]  102.23 63.14 90 bottom
R399  100K  [RC0402]  100.94 63.14 90 bottom
R400  100K  [RC0402]  99.64 63.14 90 bottom
R401  2.2K  [RC0805]  88.54 61.34 0 bottom
R402  40.2K  [RC0402]  99.01 60.88 90 bottom
R403  147K  [RC0402]  97.59 60.88 270 bottom
R404  0.01E  [RC2512]  13.39 60.4 180 bottom
R405  0.0025  [RC2512]  126.52 60.05 180 bottom
R406  35.7K  [RC0402]  99.01 58.75 90 bottom
R407  147K  [RC0402]  97.69 58.75 270 bottom
R408  35.7K  [RC0402]  99.01 56.64 90 bottom
R409  147K  [RC0402]  97.69 56.64 270 bottom
R410  100K  [RC0402]  101.07 54.28 270 bottom
R411  316K  [RC0402]  99.67 54.28 270 bottom
R412  121K  [RC0402]  98.42 52.65 180 bottom
R413  14K  [RC0402]  106.07 47.8 180 bottom
R414  14K  [RC0402]  110.92 47.73 0 bottom
R415  0  [RC0402]  106.07 45.26 180 bottom
R416  0  [RC0402]  110.92 45.19 180 bottom
R417  15K  [RC0402]  112.17 43.97 180 bottom
R418  10E  [RC0402]  26.35 38.21 270 bottom
R419  NM  [RC0402]  105.47 36.05 180 bottom
R420  10K  [RC0402]  32.72 35.59 0 bottom
R421  36K  [RC0603]  112.52 35.31 90 bottom
R422  100K  [RC0402]  108.53 35.13 270 bottom
R423  100K  [RC0402]  107.21 35.13 270 bottom
R424  36K  [RC0603]  110.72 35.03 90 bottom
R425  2.2K  [RC0402]  35.92 34.77 270 bottom
R426  NM  [RC0402]  105.48 34.63 180 bottom
R427  0.002  [RC1206]  18.22 34.53 90 bottom
R428  10K  [RC0402]  32.72 34.34 0 bottom
R429  57.6K  [RC0402]  33.66 32.51 90 bottom
R430  10K  [RC0402]  110.21 31.19 90 bottom
R431  NM  [RC0402]  108.79 31.19 270 bottom
R432  7.15K  [RC0402]  112.9 30.73 90 bottom
R433  17.4K  [RC0402]  111.63 30.73 90 bottom
R434  0  [RC0402]  106.93 30.73 0 bottom
R435  0  [RC0402]  146.79 30.15 270 bottom
R436  0  [RC0402]  145.39 30.12 270 bottom
R437  0  [RC0402]  140.26 30.01 270 bottom
R438  0  [RC0402]  138.87 30.01 90 bottom
R439  0  [RC0402]  143.97 29.96 90 bottom
R440  30.1K  [RC0402]  105.32 29.27 180 bottom
R441  9.09K  [RC0402]  107.06 28.57 90 bottom
R442  10K  [RC0402]  92.23 28.14 180 bottom
R443  619K  [RC0402]  105.33 27.99 0 bottom
R444  20K  [RC0402]  80.06 27.03 180 bottom
R445  NM  [RC0402]  77.7 26.7 270 bottom
R446  0  [RC0402]  133.84 26.41 0 bottom
R447  0  [RC0402]  133.76 24.97 0 bottom
R448  10K  [RC0402]  91.64 24.23 180 bottom
R449  10K  [RC0402]  89.36 24.23 0 bottom
R450  0  [RC0402]  133.84 23.36 0 bottom
R451  294E  [RC0402]  93.52 22.2 0 bottom
R452  0.002  [RC1206]  25.02 22.02 270 bottom
R453  0  [RC0402]  133.84 22.01 180 bottom
R454  0.002  [RC1206]  15.44 20.19 270 bottom
R455  0.002  [RC1206]  90.27 20.07 0 bottom
R456  0.002  [RC1206]  55.75 19.53 0 bottom
R457  0  [RC0402]  133.71 19.05 270 bottom
R458  0.002  [RC1206]  105.05 18.92 0 bottom
R459  0  [RC0402]  133.99 16.21 180 bottom
R460  10E  [RC0402]  79.63 15.65 180 bottom
R461  0  [RC0402]  113.74 15.44 90 bottom
R462  0  [RC0402]  136.27 13.84 90 bottom
R463  0  [RC0402]  134.82 13.82 270 bottom
R464  0.002  [RC1206]  67.82 13.56 270 bottom
R465  10K  [RC0402]  130.94 13.46 90 bottom
R466  10K  [RC0402]  129.41 13.46 90 bottom
R467  0.002  [RC1206]  78.92 13.34 180 bottom
R468  0  [RC0402]  137.62 13.33 90 bottom
R469  10K  [RC0402]  144.35 13.21 90 bottom
R470  0  [RC0402]  142.95 13.21 270 bottom
R471  0  [RC0402]  146 13.08 270 bottom
R472  0  [RC0402]  147.42 13.06 270 bottom
RNTCBIAS1  10K  [RC0402]  52.35 96.49 0 top
RSNS1  0.008  [RESC6432X47N]  70.15 66.6 90 bottom
T1  ETH1-460LD  [XFMR_ETH1-460LD]  19.87 123.19 270 bottom
T2  ETH1-460LD  [XFMR_ETH1-460LD]  60.16 122.81 270 bottom
T3  ETH1-460LD  [XFMR_ETH1-460LD]  117.08 121.32 270 bottom
T4  EPC3630G-LF  [XFMR_EPC3630G-LF]  87.35 107.75 180 bottom
T5  PE-68386NL  [XFMR_PE-68386NL]  85.85 87.86 270 bottom
TP1  ?  [TP_50]  132.08 77.55 0 top
TP2  ?  [TP_50]  74.83 75.95 0 top
TP3  ?  [TP_50]  74.85 74.32 0 top
TP4  ?  [TP_50]  26.95 73.43 0 top
TP5  Testpoint  [TP_50]  26.65 71.43 90 top
TP6  ?  [TP_50]  38.61 70.87 0 top
TP7  Testpoint  [TP_50]  30.05 68.91 90 top
TP8  ?  [TP_50]  71.22 49.1 0 top
TP9  ?  [TP_50]  53.16 42.82 0 top
TP10  ?  [TP_50]  108.48 35.03 0 top
TP11  ?  [TP_50]  129.62 34.49 0 top
TP12  ?  [TP_50]  120.85 33.88 0 top
TP13  ?  [TP_50]  135 28.78 0 top
TP14  ?  [TP_50]  124.36 24.54 0 top
TP15  ?  [TP_50]  124.18 12.85 0 top
TP16  ?  [TP_50]  125.78 12.83 0 top
TP17  ?  [TP_50]  143.43 86.28 180 bottom
TP18  ?  [TP_50]  12.95 74.17 90 bottom
TP19  Testpoint  [TP_50]  129.01 73.74 180 bottom
TP20  Testpoint  [TP_50]  119.66 68.4 180 bottom
TP21  Testpoint  [TP_50]  17.58 68.4 270 bottom
TP22  Testpoint  [TP_50]  118.59 67.28 180 bottom
TP23  Testpoint  [TP_50]  17.32 66.78 270 bottom
U1  SEP0640Q38CB  [SON127P600X500X163-8N]  16.58 138.84 270 top
U2  SEP0640Q38CB  [SON127P600X500X163-8N]  28.65 138.84 90 top
U3  SEP0640Q38CB  [SON127P600X500X163-8N]  56.37 138.46 90 top
U4  SEP0640Q38CB  [SON127P600X500X163-8N]  68.43 138.46 270 top
U5  SEP0640Q38CB  [SON127P600X500X163-8N]  109.47 137.41 270 top
U6  SEP0640Q38CB  [SON127P600X500X163-8N]  121.67 137.41 90 top
U7  ISO1541DR  [SOIC127P600X175-8N_TI]  20.37 106.94 90 top
U8  SE98ATP,547  [SON50P300X200X80-9N_NXP]  26.29 105.89 180 top
U9  MCP4017  [SOT65P210X110-6N]  24.54 93.07 0 top
U10  SE98ATP,547  [SON50P300X200X80-9N_NXP]  80.54 78.61 270 top
U11  CAT24C04WI-GT3  [SOIC127P600X175-8N_ON-SEMI]  66.33 75.27 0 top
U12  LM25145RGYR  [VQFN50P350X450X100-21N_A_REL]  60.1 38.1 90 top
U13  SE98ATP,547  [SON50P300X200X80-9N_NXP]  34.48 35.05 270 top
U14  SX1509B  [QFN40P400X400X60-29N_REL]  90.83 26.16 180 top
U15  TPS22925  [DSBGA6N50P2X3_86X136X40]  73.83 20.85 90 top
U16  CAT24C04WI-GT3  [SOIC127P600X175-8N_ON-SEMI]  122.07 19.94 90 top
U17  TPS3824-33DBVR  [SOT95P280X145-5N_AD]  116.31 16.31 90 top
U18  LT4321IUF  [QFN65P400X400X80-17N]  87.77 162.26 0 bottom
U19  SEP0640Q38CB  [SON127P600X500X163-8N]  28.65 138.84 270 bottom
